# Altium PCB openmv4_wd.PcbDoc (part 2 of 2)
Units mil, origin at the board's own origin, x right, y up, seen from the top; angles counter-clockwise.
Board outline 6000 x 4000 mil, 2 copper layers (Top Layer, Bottom Layer); 54 components, 90 nets, 396 pads, 358 vias.
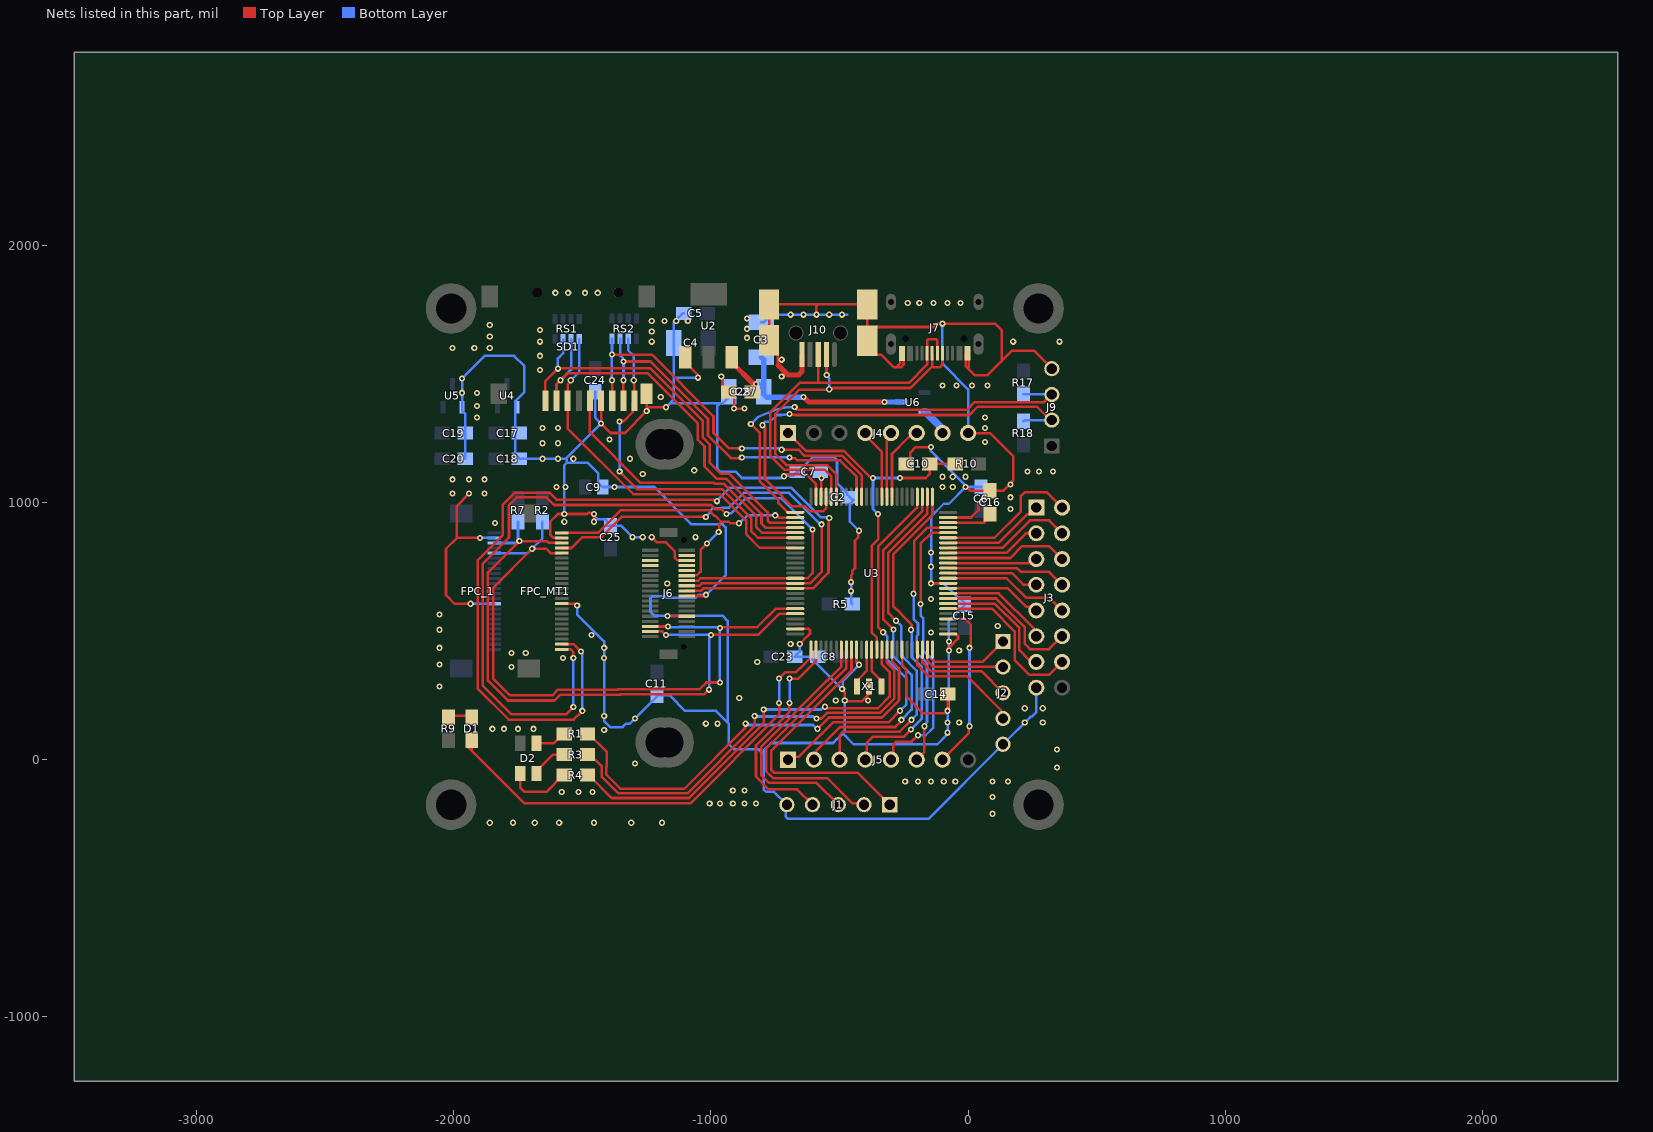
[diagram p2: the nets of this part, all layers, seen from the top]

## Via types
v1: diameter 24, hole 12, Top Layer to Bottom Layer, 358 vias

## Nets (pads, with @x,y where several pads share a name; then routed paths per layer and width w, separated by ;. In a path a pad name is that pad's centre, name@x,y a point inside that pad or via, vN(x,y) a via of type N, cw(c..) or ccw(c..) an arc to the next point about the centre after c; other vN are vias at no path point) (continued)
GND: C2.1 C3.2 C4.2 C5.1 C6.1 C7.2 C8.1 C9.1 C10.1 C11.2 C14.1 C15.1 C16.2 C17.2 C18.2 C19.2 C20.2 C23.2 C24.2 C25.2 C27.2 C28.2 FPC_1.10 FPC_1.23 FPC_MT1.2 FPC_MT1.15 J1.5 J2.5 J3.15 J4.8 J6.5 J6.19 J6.27 J7.A1 J7.A12 J7.B1 J7.B12 J9.4 J10.0 J10.5 R5.2 SD1.6 SD1.10 U2.1 U3.10 U3.19 U3.26 U3.36 U3.49 U3.74 U3.99 U4.1 U5.1 X1.2 | length 19331.2
  Top Layer w10: v1(-1940,1035) -1987.89,987.11 -1987.89,862.11 ; v1(-1934,606.2) -1996.2,606.2 -2030,640 -2030,820 -1987.89,862.11 ; v1(-1897.89,862.11) -1987.89,862.11 ; FPC_MT1.15@-1580,606.37 -1526.37,606.37 v1(-1520,600) ; FPC_MT1.2@-1580,862.28 -1580.22,862.49 -1612.49,862.49 -1625,875 -1625,925 -1595,955 v1(-1570,955) -1482,955 -1477,960 -1467.86,960 -1465.54,957.68 -1457.68,957.68 v1(-1455,955) v1(-1455,925) ; SD1.6@-1427.08,1395 v1(-1427.08,1307.08) -1390,1270 -1335,1270 v1(-1249.91,1355.09) -1249.91,1370 ; SD1.10@-1249.91,1422.56 -1249.91,1370 ; v1(-1230,865) -1210,845 -1175,845 -1140,810 -1140,785 -1138.63,783.63 -1138.63,782.84 -1131.01,775.22 -1095.13,775.22 J6.5@-1094.13,774.22 ; v1(-1175,1370) -1249.91,1370 ; v1(-1168.82,558.82) -1167.64,557.64 J6.27@-1094.13,557.64 ; U2.1@-1100,1565 -1100,1545.32 -1052.68,1497.99 ; J6.19@-1094.13,636.38 v1@-1027.06,636.38 ; v1(-960,1490) -960,1486.21 -955,1481.21 -955,1450 -935,1430 C28.2@-930,1430 -910,1410 v1(-910,1365) v1(-870,1365) ; -739.57,1534.57 -739.57,1596.73 J10.0@-773.94,1631.1 J10.0@-773.94,1769.73 -582.99,1769.73 ; -704.7,1109 -629,1109 -591.54,1071.54 U3.74@-591.54,1022.24 ; U3.99@-672.24,508.46 -620.86,508.46 -615,502.61 -615,490 -623.81,481.19 -623.81,480.95 v1(-654.76,450) ; v1(-590,1730) -590,1762.72 -582.99,1769.73 ; v1(-489.82,274.82) -489.82,271.03 -480,261.21 v1(-480,230) -477.5,227.5 -412.81,227.5 -385,255.31 X1.2@-385,285 ; v1(-455,690) -455,717 -450,722 -450,734.54 -440,744.54 -440,851.11 -427.68,863.43 -427.68,887.32 v1(-425,890) ; U3.10@-434.05,427.76 -434.05,379.05 v1(-423.97,368.97) ; J7.A12@-262.87,1579.22 -263.77,1578.31 -263.77,1542.08 -280.86,1525 ; U3.19@-256.89,427.76 -256.89,368.26 -240,351.37 -240,245 -175,180 -90,180 v1(-80,190) C14.1@-80,255 ; J7.B1@-251.06,1579.22 -251.06,1535.68 -261.73,1525 -280.86,1525 ; C10.1@-240,1150 -225,1165 -225,1195 -205,1215 v1(-145,1215) ; v1(-144.37,685.63) U3.36@-77.76,685.63 ; U3.26@-77.76,488.78 -48.72,488.78 -39.11,479.17 -39.11,470.89 -75,435 v1(-75,425) ; U3.49@-77.76,941.54 11.54,941.54 40,970 40,1000 60,1020 65,1020 85,1040 C16.2@85,1045 ; v1(-10,1060) -6.21,1060 8.79,1045 C16.2@85,1045 ; J7.B12@-8.94,1579.53 -8.94,1528.94 2.87,1517.13 ; J4.8@0,1269.68 85.31,1269.68 175,1180 175,1085 135,1045 C16.2@85,1045 ; J7.A1@2.87,1579.53 2.87,1517.13 ; J9.4@325,1520 255,1590 170,1590 130,1550 ; -582.99,1769.73 J10.0@-392.05,1769.73 J10.0@-392.05,1647.68 ; J10.0@-392.05,1647.68 J10.0@-392.05,1628 -392.05,1608.32 -357.68,1573.94 -337.68,1573.94 -288.73,1525 -280.86,1525 ; J10.0@-392.05,1647.68 -357.68,1682.06 -132.81,1682.06 -119.87,1695 v1(-100,1695) 105,1695 130,1670 130,1550 ; 2.87,1517.13 25,1495 75,1495 130,1550
  Top Layer w20: -739.57,1534.57 -700,1495 -660,1495 -645.98,1509.02 J10.5@-645.98,1575
  Bottom Layer w10: C20.2@-1955,1170 C19.2@-1955,1270 -1955,1343.62 -1967.6,1356.22 U5.1@-1967.6,1370 v1(-1967.6,1482.4) -1880,1570 -1765,1570 -1725,1530 -1725,1430 -1760,1395 -1760,1185 C18.2@-1745,1170 -1564.16,1170 ; v1(-1934,606.2) FPC_1.10@-1842.75,606.2 ; v1@-1900,860 v1(-1897.89,862.11) FPC_1.23@-1842.75,862.11 ; v1(-1570,955) -1570,1145 -1560,1155 ; v1(-1520,600) -1520,565 -1415,460 v1(-1415,435) v1@-1415,395.68 ; v1(-1455,955) -1452.32,952.32 -1452.32,946.11 -1441.21,935 -1410,935 -1405,930 -1405,910 -1350,910 v1(-1305,865) v1(-1265,865) ; C24.2@-1450,1430 -1450,1330 v1(-1427.08,1307.08) -1564.16,1170 ; v1(-1415.68,395.68) -1415.34,395.34 -1415.34,170.34 v1(-1415,170) -1415,150 -1391.67,126.67 -1343.33,126.67 -1330,140 -1315,140 v1(-1295,160) -1210,245 C11.2@-1210,250 -1160,250 -1100,190 -980,190 -935,145 ; v1(-1175,1370) -1145,1400 -1145,1485 ; -1156.21,1385 -965,1385 ; C5.1@-1105,1735 -1110,1735 -1145,1700 C4.2@-1145,1620 -1145,1485 ; v1(-1050,1485) -1145,1485 ; C27.2@-930,1420 -930,1410 -955,1385 -965,1385 ; C3.2@-805,1700 -795,1700 -770,1725 -760,1725 -755,1730 v1(-690,1730) v1(-640,1730) v1(-590,1730) v1(-540,1730) v1(-490,1730) -470,1730 ; v1(-654.76,450) -654.76,420 -664.76,410 -665,410 C23.2@-675,400 -615,400 v1(-489.82,274.82) -487.33,277.32 -487.33,305.61 v1(-423.97,368.97) ; v1(-480,230) -480,110 -487.5,102.5 ; v1(-455,690) -455,610 R5.2@-450,605 ; v1(-425,890) -460,925 -460,995 -445,1010 -450,1010 C2.1@-460,1020 -470,1030 -470,1035 -510,1075 -510,1165 -520,1175 -605,1175 -660,1120 C7.2@-665,1120 -681.55,1103.45 -714.04,1103.45 v1(-715.45,1102.04) -719.24,1102.04 -726.28,1095 -880,1095 -905,1120 -965,1120 -975,1130 -975,1375 -965,1385 ; v1(-145,1215) -145,1200 -5,1060 C6.1@50,1060 ; v1(-100,1695) -100,1539.51 0,1439.51 J4.8@0,1269.68 ; v1(-80,190) -80,100 -120,60 -445,60 -487.5,102.5 ; v1@-75,198.79 v1(-75,425) -75,540 -15,600 C15.1@-15,605 -15,610 -35,630 -40,630 -95.63,685.63 v1(-144.37,685.63) -144.37,945.63 -95,995 -75,995 v1(-10,1060) ; J3.15@265,280 265,184.71 246.39,166.11 241.39,166.11 135.29,60 J2.5@135,60 -155,-230 -700,-230 -710,-220 -710,-180 J1.5@-705,-175 -755,-125 -785,-125 -795,-115 -795,20 ; -1564.16,1170 -1560,1165.84 -1560,1155 ; -1560,1155 -1480,1155 -1438.94,1113.94 -1438.94,1077.83 C9.1@-1421.1,1060 v1(-1375,1060) -1220,1060 -1075,915 -955,915 -943,903 -943,716.64 -969.64,690 v1(-1018.7,640.94) -1048.24,640.94 -1059.19,630 -1175,630 -1180,635 -1229.14,635 -1235,629.14 -1235,575 -1220,560 -955,560 -935,540 -935,145 ; -935,145 -930,140 -930,60 -910,40 -815,40 -795,20 ; -795,20 -795,35 -765,65 -525,65 -487.5,102.5
  other v1: -1860,-245 -1770,-245 -1685,-245 -1590,-245 -1455,-245 -1310,-245 -1190,-245 95,-210 -1005,-170 -965,-170 -915,-170 -870,-170 -825,-170 95,-145 -1580,-125 -1515,-125 -1460,-125 -915,-120 -870,-120 -245,-85 -195,-85 -145,-85 -95,-85 -50,-85 95,-85 155,-85 345,-30 -1295,-15 345,40 -80,105 -1415,115 -1850,120 -1805,120 -1750,120 -1690,120 -1020,140 -975,140 -80,145 -35,145 220,145 290,145 220,200 290,200 -515,230 -390,230 -890,240 -2055,285 -1775,360 -2055,370 -820,380 -1575,395 -1775,415 -1720,415 -35,425 -2055,435 -690,450 -75,460 -1465,485 -145,495 -2055,505 115,520 -2055,565 -145,625 -455,655 -1170,685 -145,750 -145,805 -1060,865 -1840,920 -1570,925 165,975 165,1020 -2005,1035 -1880,1035 -1600,1060 -1565,1060 -100,1060 -60,1060 165,1070 -2005,1090 -1940,1090 -1880,1090 -100,1100 -60,1100 -10,1100 -1265,1110 230,1120 275,1120 330,1120 -1065,1125 -1654.58,1170 -1595,1170 -1535,1170 -1315,1170 -1655,1230 -1595,1230 65,1235 -1395,1245 -1655,1290 -1595,1290 65,1290 -1910,1330 65,1330 -1910,1375 -1195,1410 -1910,1425 -1967.6,1426.2 -100,1455 -45,1455 15,1455 75,1455 -725,1490 -1665,1515 -725,1555 -1665,1570 -2005,1600 -1920,1600 -1860,1600 -1665,1625 -1230,1625 175,1625 355,1625 -860,1640 -1860,1645 -1230,1665 -1665,1670 -860,1675 -1860,1690 -1230,1705 -1180,1705 -1135,1705 -1090,1705 -860,1715 -235,1775 -190,1775 -135,1775 -80,1775 -30,1775 -1605,1815 -1555,1815 -1490,1815 -1440,1815
I2C1_SCL: FPC_1.20 FPC_MT1.5 J6.32 R2.1 U3.95 | length 2704.9
  Top Layer w10: FPC_MT1.5@-1580,803.22 -1623.22,803.22 -1640,820 v1(-1695,820) -1847,668 -1847,315.89 -1781.11,250 -1616.57,250 -1594.57,272 -1360.79,272 -1358.79,274 -1043.53,274 -1017.53,300 v1(-965,300) ; J6.32@-1236,518.27 -1235.62,517.88 -1167.88,517.88 v1(-1167.5,517.5) ; v1(-965,512.43) -962.43,515 -820,515 -747.8,587.2 U3.95@-672.24,587.2
  Bottom Layer w10: FPC_1.20@-1842.75,803.05 -1711.95,803.05 v1(-1695,820) -1655,860 R2.1@-1655,925 ; v1(-1167.5,517.5) -1164.97,514.97 -967.53,514.97 v1(-965,512.43) v1(-965,300)
I2C1_SDA: FPC_1.22 FPC_MT1.3 J6.34 R7.2 U3.96 | length 2668.1
  Top Layer w10: FPC_MT1.3@-1580,842.59 -1630,842.59 -1637.41,850 v1(-1745,850) -1867,728 -1867,307.6 -1789.4,230 -1608.28,230 -1586.28,252 -1352.51,252 -1350.51,254 -1027.18,254 -1009.01,272.17 v1(-1007.17,272.17) ; J6.34@-1236,498.58 -1189.5,498.58 -1175.92,485 v1(-1175,485) ; v1(-999.64,485) -816.74,485 -734.22,567.52 U3.96@-672.24,567.52
  Bottom Layer w10: FPC_1.22@-1842.75,842.42 -1756.36,842.42 -1748.79,850 v1(-1745,850) -1745,853.79 -1750,858.79 R7.2@-1750,925 ; v1(-1175,485) v1(-999.64,485) -999.64,481.21 -1007.44,473.42 -1007.44,272.44 v1(-1007.17,272.17)
"LED B": R1.1 U3.17 | length 1729.6
  Top Layer w10: R1.1@-1480,100 -1475,100 -1405,30 -1405,-25 -1407,-27 -1407,-57.54 -1351.54,-113 -1103,-113 -867.68,122.32 -867.68,137.32 v1(-865,140) ; v1(-585.18,120.18) -541.36,164 -335.09,164 -269,230.09 -269,354.91 -295.91,381.82 -295.91,427.41 U3.17@-296.26,427.76
  Bottom Layer w10: v1(-865,140) -861.21,140 -856.21,135 -603.79,135 -588.97,120.18 v1(-585.18,120.18)
"LED G": R3.1 U3.16 | length 1664.2
  Top Layer w10: R3.1@-1480,20 -1460,0 -1450,0 -1425,-25 -1425,-65 -1359,-131 -1091.91,-131 -830,130.91 ; -831.41,132.33 -830,133.74 v1(-830,170) ; v1(-590,160) -570.81,160 -548.81,182 -342.54,182 -287,237.54 -287,347.46 -315.94,376.4 U3.16@-315.94,427.76
  Bottom Layer w10: v1(-830,170) -828,168 -601.79,168 -593.79,160 v1(-590,160)
"LED R": R4.2 U3.15 | length 1607.1
  Top Layer w10: R4.2@-1480,-60 -1475,-60 -1386,-149 -1084.46,-149 -795,140.46 v1(-795,195) ; v1(-556.94,205.64) -553.15,205.64 -547.51,200 -350,200 -305,245 -305,340 -335.63,370.63 U3.15@-335.63,427.76
  Bottom Layer w10: v1(-795,195) -571.37,195 -560.73,205.64 v1(-556.94,205.64)
LED_IR: D1.2 U3.1 | length 1825.3
  Top Layer w10: D1.2@-1947.5,52.5 -1930,35 ; D1.2@-1930,85 D1.2@-1930,75 -1930,35 ; v1(-735,220) -735,175 -1080,-170 -1725,-170 -1930,35 ; v1(-735,315) -710,340 -670,340 -655,355 -654.45,355 -611.22,398.23 U3.1@-611.22,427.76
  Bottom Layer w10: v1(-735,220) v1(-735,315)
NetC7_1: C7.1 U3.73 | length 73.5
  Top Layer w10: U3.73@-571.85,1022.24 -571.85,1093.15 v1(-570,1095)
NetC16_1: C16.1 U3.48 | length 189.4
  Top Layer w10: U3.48@-77.76,921.85 61.85,921.85 70,930 75,930 95,950 C16.1@95,955
NetD1_1: D1.1 R9.2 | length 99.9
  Top Layer w10: R9.2@-2029.91,170 D1.1@-1930,170
NetD2_1: D2.1 R1.2 | length 123.4
  Top Layer w10: D2.1@-1678.5,64.06 -1610.94,64.06 -1575,100 R1.2@-1570,100
NetD2_2: D2.2 R3.2 | length 144.9
  Top Layer w10: D2.2@-1678.5,-54.06 -1678.5,-44.21 -1614.29,20 R3.2@-1570,20
NetD2_3: D2.3 R4.1 | length 259.7
  Top Layer w10: D2.3@-1741.5,-54.06 -1741.5,-108.5 -1725,-125 -1640,-125 -1575,-60 R4.1@-1570,-60
NetU3_12: U3.12 X1.1 | length 148.5
  Top Layer w10: X1.1@-432.24,295 -431.93,295 -425.43,301.5 -425.43,314.57 -394.68,345.32 U3.12@-394.68,427.76
NetU3_13: U3.13 X1.3 | length 148.4
  Top Layer w10: U3.13@-375,427.76 -375,345 -344.57,314.57 -344.57,301.5 -338.07,295 X1.3@-337.76,295
NRST: C10.2 J4.1 R10.2 U3.14 | length 1462.7
  Top Layer w10: J4.1@-700,1270 -630,1200 -482.94,1200 -380.62,1097.68 -372.68,1097.68 v1(-370,1095) ; U3.14@-355.31,427.76 -355.31,475.31 -375,495 -375,831.26 -350,856.26 v1(-350,955) ; v1(-265,1095) -165,1095 -150,1110 C10.2@-150,1150 R10.2@-50,1150
  Bottom Layer w10: v1(-350,955) -370,975 v1(-370,1095) v1(-265,1095)
P_IN: J4.7 U6.2 | length 113.6
  Bottom Layer w30: U6.2@-170,1352.6 -166.54,1352.6 -106.31,1292.38 -106.31,1276.31 J4.7@-100,1270
PA0_U4_TX: J2.4 U3.22 | length 493.7
  Top Layer w10: U3.22@-197.83,427.76 -197.83,367.83 -155,325 -4.64,325 126.19,194.16 126.19,168.81 J2.4@135,160
PA1_U4_RX: J2.3 U3.23 | length 412.2
  Top Layer w10: U3.23@-178.15,427.76 -178.15,377.24 -144.91,344 51,344 J2.3@135,260
PA2_U2_TX: J2.2 U3.24 | length 347.7
  Top Layer w10: U3.24@-158.46,427.76 -158.46,383.01 -137.46,362 133,362 J2.2@135,360
PA3_U2_RX: J2.1 U3.25 | length 349.5
  Top Layer w10: U3.25@-138.78,427.76 -138.72,427.7 -138.72,388.72 -130,380 55,380 J2.1@135,460
PA5_DAC: J5.7 U3.29 | length 667.8
  Top Layer w10: J5.7@-100,0 3,103 3,128 v1(5,130) ; U3.29@-77.76,547.83 -12.83,547.83 10,525 10,447.86 7.68,445.54 7.68,437.68 v1(5,435)
  Bottom Layer w10: v1(5,130) v1(5,435)
PA7: J3.14 U3.31 | length 635.1
  Top Layer w10: U3.31@-77.76,587.2 92.8,587.2 180.86,499.14 180.86,387.94 238.8,330 315,330 J3.14@365,380
PB0: J3.11 U3.34 | length 423.3
  Top Layer w10: U3.34@-77.76,646.26 118.74,646.26 255.05,509.95 255.05,489.95 J3.11@265,480
PB1: J3.9 U3.35 | length 378.4
  Top Layer w10: U3.35@-77.76,665.94 154.06,665.94 225,595 235.93,595 250.93,580 J3.9@265,580
PB10_I2C2_SCL: J5.5 U3.46 | length 1106.3
  Top Layer w10: J5.5@-300,0 -292.12,7.88 -292.12,57.88 -280,70 -220,70 v1(-195,95) ; v1(-185,605) -185,839.68 -142.52,882.17 ; -142.52,882.48 U3.46@-77.76,882.48
  Bottom Layer w10: v1(-195,95) -165,95 -135,125 -135,385 -175,425 -175,550 -184.82,559.82 -184.82,604.82 v1(-185,605)
PB11_I2C2_SDA: J5.6 U3.47 | length 1046.9
  Top Layer w10: v1(-212,645) -210,647 -210,850 -157.83,902.17 U3.47@-77.76,902.17 ; J5.6@-200,0 -170,30 v1(-170,130)
  Bottom Layer w10: v1(-212,645) -212,547 -195,530 -195,485 -200,480 -200,415 -160,375 -160,145 -170,135 v1(-170,130)
PB12_SPI2_NSS: J5.4 U3.51 | length 1295.4
  Top Layer w10: J5.4@-400,0 -395,5 -395,65 -370,90 -249.64,90 v1(-222.32,117.32) ; v1(-222,505) -220,507 -220,525 -262,567 -262,567.46 -292,597.46 -292,797.54 -138.78,950.76 U3.51@-138.78,1022.24
  Bottom Layer w10: v1(-222.32,117.32) -180,159.64 -180,360 -220,400 -220,503 v1(-222,505)
PB13_SPI2_SCLK: J5.3 U3.52 | length 1383.7
  Top Layer w10: J5.3@-500,0 -500,95 -486,109 -266,109 v1(-220,155) ; v1(-280,540) -310,570 -310,805 -158.46,956.54 U3.52@-158.46,1022.24
  Bottom Layer w10: v1(-280,540) -260,520 -260,405 -200,345 -200,175 v1(-220,155)
PB14_SPI2_MISO: J5.2 U3.53 | length 1413.3
  Top Layer w10: J5.2@-600,0 -589.86,10.14 -589.86,35.14 -498,127 -284.27,127 -260,151.27 v1(-260,155) ; v1(-290.58,505.58) -330,545 -330,814.54 -178.15,966.39 U3.53@-178.15,1022.24
  Bottom Layer w10: v1(-290.58,505.58) -290.58,400.58 -220,330 -220,195 v1(-260,155)
PB15_SPI2_MOSI: J5.1 U3.54 | length 1464.8
  Top Layer w10: J5.1@-700,0 -689.36,10.64 -659.36,10.64 -525,145 -310,145 v1(-264.63,190.37) ; v1(-330.5,495.5) -350,515 -350,827.98 -198.15,979.83 -198.15,984.85 ; -197.83,984.85 U3.54@-197.83,1022.24
  Bottom Layer w10: v1(-330.5,495.5) -315,480 -315,390 -240,315 -240,215 v1(-264.63,190.37)
PC4: J3.13 U3.32 | length 486.5
  Top Layer w10: U3.32@-77.76,606.89 103.11,606.89 198.86,511.14 198.86,426.14 235.05,389.95 255.05,389.95 J3.13@265,380
PC5: J3.12 U3.33 | length 583.2
  Top Layer w10: U3.33@-77.76,626.57 108.43,626.57 110.11,624.89 110.57,624.89 216.86,518.6 216.86,518.14 220,515 220,450 240,430 315,430 J3.12@365,480
PC13: J1.3 U3.7 | length 964.8
  Top Layer w10: J1.3@-505,-175 -590,-90 -775,-90 -805,-60 -805,50 -548,307 -547.54,307 -514.48,340.06 -514.48,340.52 -493.11,361.89 U3.7@-493.11,427.76
PC14: J1.2 U3.8 | length 1035.9
  Top Layer w10: U3.8@-473.43,427.76 -473.43,356.57 -475.11,354.89 -475.11,353.98 -785,44.09 -785,-45.46 -762.46,-68 -762,-68 -758,-72 -547.86,-72 -449.86,-170 -410,-170 J1.2@-405,-175
PC15: J1.1 U3.9 | length 1112.6
  Top Layer w10: U3.9@-453.74,427.76 -453.74,346.26 -765,35 -765,-40 -755,-50 -430,-50 J1.1@-305,-175
PD12_TIM4_CH1: J4.6 U3.59 | length 296.4
  Top Layer w10: U3.59@-296.26,1022.24 -296.26,1188.74 -235,1250 -234.34,1250 -214.34,1270 J4.6@-200,1270
PD13_TIM4_CH2: J4.5 U3.60 | length 254.4
  Top Layer w10: U3.60@-315.94,1022.24 -315.94,1239.72 -300,1255.66 J4.5@-300,1270
PD14_TIM4_CH3: J4.4 U3.61 | length 274.4
  Top Layer w10: J4.4@-400,1270 -400,1260 -335.63,1195.63 U3.61@-335.63,1022.24
PE3: J1.4 U3.2 | length 875.4
  Top Layer w10: v1(-695,220) -695,185.46 -825,55.46 -825,-65.46 -775.46,-115 -665,-115 J1.4@-605,-175 ; v1(-694.37,315) -660,315 -591.54,383.46 U3.2@-591.54,427.76
  Bottom Layer w10: v1(-695,220) -694.37,220.63 v1(-694.37,315)
PE7: J3.10 U3.37 | length 494.7
  Top Layer w10: U3.37@-77.76,705.32 149.69,705.32 225,630 315,630 J3.10@365,580
PE8: J3.7 U3.38 | length 361.4
  Top Layer w10: U3.38@-77.76,725 170,725 214.95,680.05 264.95,680.05 J3.7@265,680
PE9: J3.8 U3.39 | length 469.5
  Top Layer w10: U3.39@-77.76,744.68 190.31,744.68 205,730 315,730 J3.8@365,680
PE10: J3.5 U3.40 | length 349.2
  Top Layer w10: U3.40@-77.76,764.37 235.3,764.37 250.93,780 J3.5@265,780
PE11: J3.6 U3.41 | length 482.5
  Top Layer w10: U3.41@-77.76,784.06 164.06,784.06 210,830 315,830 J3.6@365,780
PE12: J3.3 U3.42 | length 374.3
  Top Layer w10: U3.42@-77.76,803.74 148.74,803.74 224.86,879.86 264.86,879.86 J3.3@265,880
PE13: J3.4 U3.43 | length 507.6
  Top Layer w10: U3.43@-77.76,823.43 133.43,823.43 240,930 315,930 J3.4@365,880
PE14: J3.1 U3.44 | length 399.5
  Top Layer w10: U3.44@-77.76,843.11 118.11,843.11 229,954 239,954 J3.1@265,980
PE15: J3.2 U3.45 | length 576.2
  Top Layer w10: U3.45@-77.76,862.8 102.8,862.8 205,965 205,1025 220,1040 305,1040 J3.2@365,980
RSVD2: J6.3
RSVD3: J6.7
RSVD4: J6.9
RSVD5: J6.6
RSVD6: J6.8
SD_CD: RS2.6 SD1.9 U3.81 | length 1377.6
  Top Layer w10: v1(-1355,1315) -1353.41,1316.59 -1338.41,1316.59 -1303.97,1351.03 -1303.97,1388.19 SD1.9@-1297.16,1395 -1298.58,1396.42 -1298.58,1473.58 v1(-1300,1475) ; v1(-1354.82,1120.18) -1286.64,1052 -956.75,1052 -843.5,938.75 -843.5,888.5 -817.8,862.8 U3.81@-672.24,862.8
  Bottom Layer w10: v1(-1355,1315) -1354.91,1314.91 -1354.91,1120.27 v1(-1354.82,1120.18) ; RS2.6@-1321.5,1636.26 -1321.5,1591.5 -1300,1570 v1(-1300,1475)
SDIO_CLK: SD1.5 U3.80 | length 1107.4
  Top Layer w10: SD1.5@-1470.39,1395 -1470.39,1273.06 -1273.32,1076 -989.28,1076 -985.28,1072 -948.46,1072 -823.5,947.04 -823.5,903.5 -802.48,882.48 U3.80@-672.24,882.48
SDIO_CMD: RS1.5 SD1.3 U3.83 | length 1474.9
  Top Layer w10: v1(-1545,1475) -1545,1471.21 -1557,1459.21 SD1.3@-1557,1395 -1557,1287 -1302,1032 -965.03,1032 -863.5,930.47 -863.5,876.68 -810.24,823.43 U3.83@-672.24,823.43
  Bottom Layer w10: v1(-1545,1475) -1512.01,1507.99 RS1.5@-1512.01,1635
SDIO_D0: RS2.8 SD1.7 U3.65 | length 1528.7
  Top Layer w10: v1(-1385,1475) -1384.39,1474.39 -1384.39,1395.61 SD1.7@-1383.77,1395 ; v1(-1385,1575) -1230,1575 -990,1335 -990,1270 -930,1210 v1(-880,1210) ; v1(-725,1205) -660.46,1205 -637.46,1182 -490.39,1182 -414.37,1105.98 U3.65@-414.37,1022.24
  Bottom Layer w10: v1(-1385,1475) v1(-1385,1575) -1384.74,1575.26 -1384.74,1636 RS2.8@-1384.49,1636.26 ; v1(-880,1210) -733.79,1210 -728.79,1205 v1(-725,1205)
SDIO_D1: RS2.7 SD1.8 U3.66 | length 1455.9
  Top Layer w10: SD1.8@-1340.46,1395 -1340.23,1395.23 -1340.23,1474.77 v1(-1340,1475) ; v1(-1340,1548) -1234.58,1548 -1011.57,1324.99 -1011.57,1261.12 -922.78,1172.32 -882.68,1172.32 v1(-880,1175) ; v1(-695,1175) -692.32,1172.32 -672.78,1172.32 -664.46,1164 -497.85,1164 -434.05,1100.21 U3.66@-434.05,1022.24
  Bottom Layer w10: RS2.7@-1352.99,1636.26 -1352.99,1571.78 -1342.68,1561.47 -1342.68,1547.68 -1340,1545 v1(-1340,1475) ; v1(-880,1175) v1(-695,1175)
SDIO_D2: RS1.7 SD1.1 U3.78 | length 1539.1
  Top Layer w10: SD1.1@-1643.61,1395 -1643.61,1471.39 -1592,1523 -1591,1522 -1236.86,1522 -1031.57,1316.71 -1031.57,1252.83 -1005,1226.26 -1005,1155 -962,1112 -930.18,1112 -780,961.82 -780,930 -772.17,922.17 -771.85,922.17 ; -771.85,921.85 U3.78@-672.24,921.85
  Bottom Layer w10: v1(-1595,1520) -1595,1560 -1575,1580 RS1.7@-1575,1635
SDIO_D3: RS1.6 SD1.2 U3.79 | length 1540.6
  Top Layer w10: SD1.2@-1600.31,1395 -1600.31,1459.69 -1558,1502 -1245.15,1502 -1051.57,1308.43 -1051.57,1244.55 -1025,1217.98 -1025,1140 -977,1092 -940.18,1092 -803.5,955.32 -803.5,918.5 -787.17,902.17 U3.79@-672.24,902.17
  Bottom Layer w10: v1(-1585,1475) -1543.5,1516.5 RS1.6@-1543.5,1635
SPI3_MISO: FPC_MT1.4 J6.15 U3.90 | length 1886.4
  Top Layer w10: FPC_MT1.4@-1580,822.91 -1542.09,822.91 -1500.13,864.87 -1425.59,864.87 -1345.46,945 -1022,945 v1(-1020,943) ; J6.15@-1094.13,676.22 -1044.24,676.22 -1034.83,685.63 U3.90@-672.24,685.63 -614.37,685.63 -570,730 v1(-570,915)
  Bottom Layer w10: v1(-1020,943) -1000.87,962.13 -1000.87,969.13 -992,978 -961.77,978 -959.77,980 -929.54,980 -872.54,1037 -695.79,1037 -573.79,915 v1(-570,915)
SPI3_MOSI: FPC_MT1.23 J6.17 U3.91 | length 3713.7
  Top Layer w10: FPC_MT1.23@-1580,448.89 -1533.89,448.89 v1(-1505,420) ; v1(-1500,190) -1534,156 -1786,156 -1907,277 -1907,774.82 -1810,871.82 -1810,990.46 -1762.46,1038 -1626.89,1038 -1598.89,1010 -991.4,1010 -989.08,1007.68 -979.18,1007.68 v1(-976.5,1005) ; J6.17@-1094.13,656.22 -1038.78,656.22 -1029.06,665.94 U3.91@-672.24,665.94 -604.06,665.94 -543,727 -543,917.46 -542.68,917.78 -542.68,937.32 v1(-540,940)
  Bottom Layer w10: v1(-1505,420) -1505,416.21 -1499.59,410.8 v1@-1499.59,190.41 ; v1(-976.5,1005) -976.5,1008.5 -928,1057 -687.5,1057 -572.5,942 -542,942 v1(-540,940)
SPI3_SCLK: FPC_MT1.24 J6.13 U3.89 | length 3384.9
  Top Layer w10: FPC_MT1.24@-1580,429.21 -1544.66,429.21 -1535,419.54 v1(-1535,395) ; v1(-1535,205) -1564,176 -1776,176 -1887,287 -1887,762.54 -1785,864.54 -1785,990 -1755,1020 -1640,1020 -1610,990 -999.68,990 -983.52,973.84 -959.34,973.84 v1@-940.5,955 ; J6.13@-1094.13,696.22 -1049.69,696.22 -1040.6,705.32 U3.89@-672.24,705.32 -624.68,705.32 -605,725 v1(-605,895)
  Bottom Layer w10: v1(-1535,205) v1(-1535,395) ; v1(-940,955) -937.32,957.68 -922.32,957.68 -863,1017 -727,1017 v1(-605,895)
SPI3_SSEL: FPC_MT1.1 J6.11 U3.77 | length 1269.7
  Top Layer w10: FPC_MT1.1@-1580,881.96 -1579.09,882.87 -1437.13,882.87 -1350,970 -1007.97,970 -985.47,947.5 -982.5,947.5 -960,925 ; J6.11@-1094.13,715.22 -1093.13,716.22 -1055.15,716.22 -1040,731.37 -1040,815 v1(-1015,840) ; v1(-970,885) -968,887 -968,917 -960,925 ; v1(-890.5,919.28) -924.29,919.28 -930,925 -960,925 ; v1(-750,950) -746.21,950 -736.97,940.76 -736.53,941.19 -702.61,941.19 -702.26,941.54 U3.77@-672.24,941.54
  Bottom Layer w10: v1(-1015,840) v1(-970,885) ; v1(-890.5,919.28) -888.78,919.28 -858.07,950 v1(-750,950)
SWCLK: J9.3 R17.1 U3.76 | length 1760.2
  Top Layer w10: v1(-845,1305) -810,1270 -810,1082.17 -738,1010.17 -738,997.94 -702.12,962.06 -673.08,962.06 U3.76@-672.24,961.22 ; v1(-674.52,1370.64) -674.52,1369.52 -665,1360 -5,1360 25,1390 295,1390 J9.3@325,1420
  Bottom Layer w10: v1(-845,1305) -817.93,1332.07 -748.28,1360 -706.18,1370.5 v1(-674.52,1370.64) ; R17.1@215,1420 J9.3@325,1420
SWDIO: J9.2 R18.1 U3.72 | length 1843.4
  Top Layer w10: v1(-800,1300) -790,1290 -790,1090.46 -757.54,1058 -757.19,1058 -684.19,985 -635,985 -615,965 -565,965 -552.51,977.49 -552.51,1021.9 U3.72@-552.17,1022.24 ; v1(-695,1343.5) -692.32,1340.82 -674.1,1340.82 -673.28,1340 5,1340 37,1372 268,1372 320,1320 J9.2@325,1320
  Bottom Layer w10: v1(-800,1300) -800,1303 -790,1313 -773.63,1313 -745.99,1336.5 -740,1340 -727,1340 v1(-695,1343.5) ; R18.1@215,1315 220,1320 J9.2@325,1320
USB_DM: J7.A7 J7.B7 J10.2 U3.70 | length 1483
  Top Layer w10: J10.2@-551.5,1575 -550.75,1574.25 -550.75,1495.75 v1(-550,1495) ; v1@-542.68,1437.68 -537.68,1442.68 -529.46,1442.68 -527.14,1445 -224.91,1445 -139.06,1530.86 ; v1(-540,1440) -542.32,1437.68 -656.87,1437.68 -750,1344.54 -750,1188.42 -706.58,1145 -549.54,1145 -512.8,1108.25 U3.70@-512.8,1022.24 ; J7.A7@-139.84,1579.53 -139.06,1578.75 -139.06,1530.86 ; J7.B7@-100.47,1579.53 -101.25,1578.75 -101.25,1533.75 -110,1525 -133.2,1525 -139.06,1530.86
  Bottom Layer w10: v1(-550,1495) -550,1491.21 -540,1481.21 v1(-540,1440)
USB_DP: J7.A6 J7.B6 J10.3 U3.71 | length 1503.5
  Top Layer w10: J10.3@-582.99,1575 -582.99,1467.01 -585,1465 ; U3.71@-532.48,1022.24 -532.48,1102.48 -557,1127 -714.03,1127 -770,1182.97 -770,1350 -655,1465 -585,1465 ; J7.A6@-120.15,1579.53 -120.15,1629.14 -126.01,1635 -153.66,1635 -159.52,1629.14 J7.B6@-159.52,1579.53 -159.52,1535.99 -230.51,1465 -585,1465
VIN: C3.1 C27.1 C28.1 U2.3 U6.3 | length 884.1
  Top Layer w20: U2.3@-918.9,1565 -918.9,1545.32 -834.35,1460.77 -825.77,1460.77 v1(-825,1460) ; v1(-640,1410) -620.22,1390.22 v1@-325.23,1390.22
  Bottom Layer w20: v1(-825,1460) -815,1460 C27.1@-795,1440 ; C3.1@-805,1565 -795,1555 C27.1@-795,1440 ; v1(-640,1410) -640.77,1409.23 -784.23,1409.23 -795,1420 C27.1@-795,1440 ; v1(-325,1390) U6.3@-260,1390
pads on no net: FPC_1.1 FPC_1.24 FPC_1.25 FPC_1.26 FPC_MT1.10 FPC_MT1.25 FPC_MT1.26 J6. J6.1 J6.F1 J6.F2 J7.0 J7.1 J7.A5 J7.A8 J7.B5 J7.B8 J10. J10.4 RS1.8 RS2.5 SD1.0 SD1.11 SD1.12 SD1.13 U3.18 U3.55 U3.56 U3.57 U3.58 U3.62 U3.82 U3.84 U3.85 U3.86 U3.87

## Polygon pours and split planes (outlines as drawn)
GND on Top Layer "GND_L01_P000" (solid, remove dead copper, pour order 0): -2160,1895 -2165,1890 -2165,-335 480,-335 500,-355 530,-325 530,1910 -2160,1910 -2165,1905
GND on Bottom Layer "GND_L02_P001" (solid, remove dead copper, pour order 1): -2155,1915 -2190,1880 -2190,-365 345,-365 525,-185 525,1900 -2175,1900 -2230,1845

## Keep-outs
Keep-Out Layer:
  lines w10: -2125.39,-239.61 -2125.39,1805 ; -2125.39,-235 ccw(c-2072.7,-232.3) -2070,-285 ; -2125,1795 cw(c-2045,1790) -2040,1870 ; -2075,-285 335,-285 ; -2065,1870 325,1870 ; 320,1870 cw(c325,1780) 415,1785 ; 340,-285 ccw(c335,-205) 415,-200 ; 415,-215 415,1780

## Silkscreen, mask and mechanical layers (free items; w line width, h text height)
Top Overlay:
  lines w10: -10,580 190,580 210,560
  text "P_IN" at -108.47,1340.05 h60 r45
  text "GND" at -1.41,1332.99 h60 r45
  text "NRST" at -725,1332.07 h30 r45
  text "PD14" at -405,1329.33 h60 r45
  text "PD13" at -306.41,1327.99 h60 r45
  text "PD12" at -205.94,1327.51 h60 r45
  text "BOOT" at -610,1327.07 h30 r45
  text "FSIN" at -500,1327.07 h30 r45
  text "艺达的小车" at -1905,1210 h100
  text "QQ:306136554" at -1905.68,1113.01 h100
  text "PE14" at -15,870 h30
  text "PE15" at 105,870 h30
  text "PE12" at -15,825 h30
  text "PE13" at 105,825 h30
  text "PE10" at -15,785 h30
  text "PE11" at 105,785 h30
  text "PE8" at -15,745 h30
  text "PE9" at 105,745 h30
  text "PB1" at -15,705 h30
  text "PE7" at 105,705 h30
  text "PB0" at -15,665 h30
  text "PC5" at 105,665 h30
  text "PC4" at -15,630 h30
  text "PA7" at 105,630 h30
  text "GND" at -15,595 h30
  text "3V3" at 105,595 h30
  text "PA3" at -5,455 h30
  text "V1.1  20211210" at -1900,385 h60 r90
  text "openMV4 BASE" at -2003.66,382 h80 r90
  text "PA2" at 0,350 h30
  text "PA1" at 5,255 h30
  text "PA0" at 10,155 h30
  text "GND" at 10,115 h30
  text "PB15" at -715,67.07 h30 r45
  text "PB14" at -605,67.07 h30 r45
  text "PB12" at -415,67.07 h30 r45
  text "PB10" at -310,67.07 h30 r45
  text "3V3" at -30,65 h30
  text "PB13" at -510,62.07 h30 r45
  text "PB11" at -190,62.07 h30 r45
  text "PA5" at -90,57.07 h30 r45
  text "PE3" at -645,-90 h30
  text "PC14" at -435,-90 h30
  text "GND" at -750,-115 h30
  text "PC13" at -550,-115 h30
  text "PC15" at -350,-120 h30